# Altium PCB VRAM SIMM MT42C8255DJ v1.0_PCB_Altium.pcbdoc
Units mil, origin at the board's own origin, x right, y up, seen from the top; angles counter-clockwise.
Board outline 5060 x 1930 mil, 2 copper layers (Top Layer, Bottom Layer); 5 components, 59 nets, 290 pads, 64 vias.
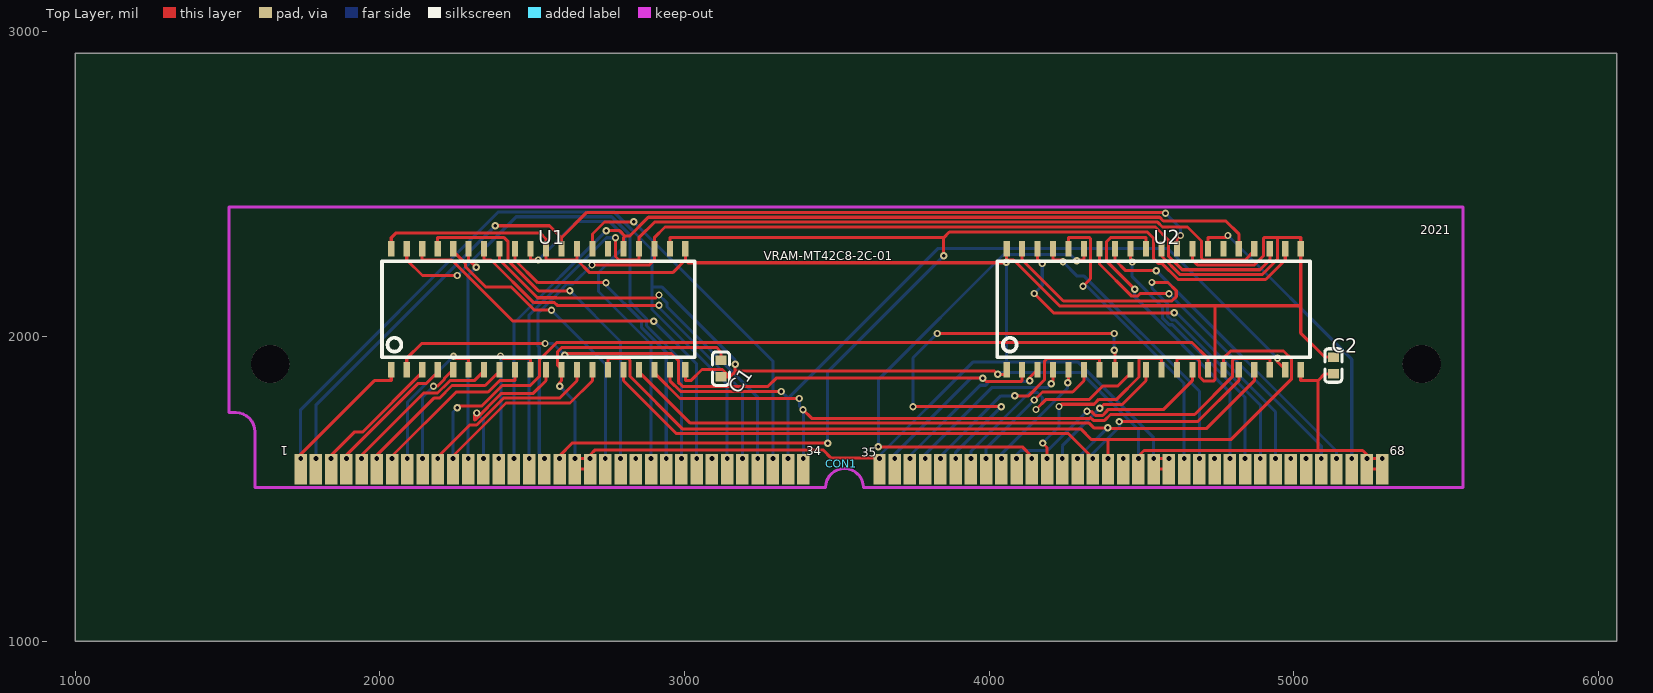
[diagram p0: Top Layer view]
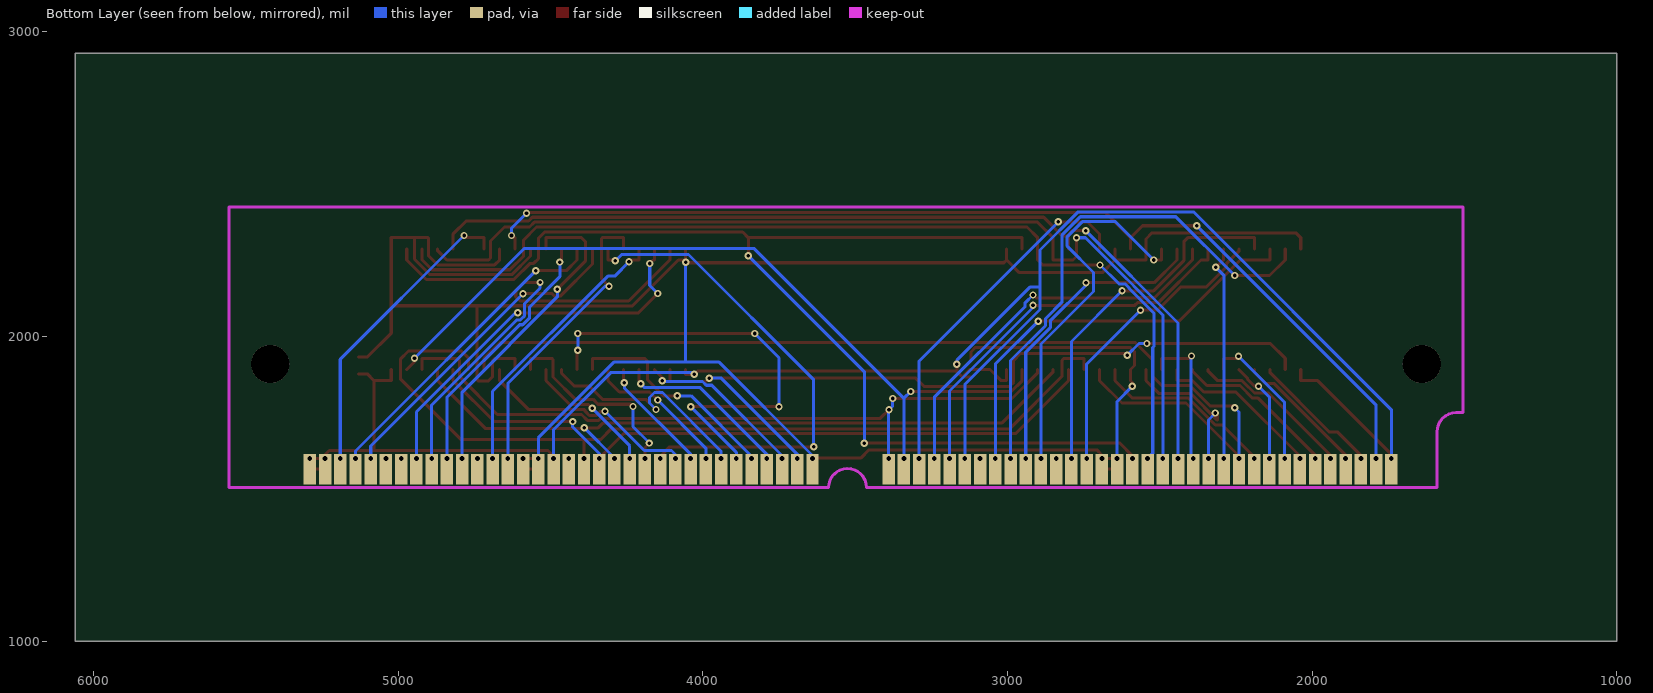
[diagram p1: Bottom Layer view, seen from below]

## Layer stack, top to bottom
Top Layer: signal copper (thickness not stored)
Dielectric: dielectric 12.6, FR-4, Dk 4.8
Bottom Layer: signal copper (thickness not stored)

## Board outline
6060,1000 1000,1000 1000,2930 6060,2930

## Components (designator, comment, footprint, x,y, rotation, side; value= is the part's Value field where it differs from the comment)
C1 "1uF" C0603 3120,1895 r90 top
C2 "1uF" C0603 5130,1905 r90 top
CON1 "SIMM68" SIMM68R 1720,1515 r0 top
U1 "MT42C8255DJ" SOJ40 2520,2095 r0 top
U2 "MT42C8255DJ" SOJ40 4540,2095 r0 top

## Footprints (in the part's own frame and the unit in brackets; to place one, negate y for a bottom-side part, rotate by r counter-clockwise, add the part's x,y. Pads: shape width x height; smd on the part's side, far side on the other; paste and mask are expansions set on the pad)
C0603 [mm]
  rect 0.8x0.9 smd: 1(-0.7,0) 2(0.7,0)
  silkscreen extent -1.4,-0.7 1.4,0.72
SIMM68R [mm]
  rect 1.04x2.54 smd: 1(0.508,1.27) 2(1.778,1.27) 3(3.048,1.27) 4(4.318,1.27) 5(5.588,1.27) 6(6.858,1.27) 7(8.128,1.27) 8(9.398,1.27) 9(10.668,1.27) 10(11.938,1.27) 11(13.208,1.27) 12(14.478,1.27) 13(15.748,1.27) 14(17.018,1.27) 15(18.288,1.27) 16(19.558,1.27) 17(20.828,1.27) 18(22.098,1.27) 19(23.368,1.27) 20(24.638,1.27) 21(25.908,1.27) 22(27.178,1.27) 23(28.448,1.27) 24(29.718,1.27) 25(30.988,1.27) 26(32.258,1.27) 27(33.528,1.27) 28(34.798,1.27) 29(36.068,1.27) 30(37.338,1.27) 31(38.608,1.27) 32(39.878,1.27) 33(41.148,1.27) 34(42.418,1.27) 35(48.768,1.27) 36(50.038,1.27) 37(51.308,1.27) 38(52.578,1.27) 39(53.848,1.27) 40(55.118,1.27) 41(56.388,1.27) 42(57.658,1.27) 43(58.928,1.27) 44(60.198,1.27) 45(61.468,1.27) 46(62.738,1.27) 47(64.008,1.27) 48(65.278,1.27) 49(66.548,1.27) 50(67.818,1.27) 51(69.088,1.27) 52(70.358,1.27) 53(71.628,1.27) 54(72.898,1.27) 55(74.168,1.27) 56(75.438,1.27) 57(76.708,1.27) 58(77.978,1.27) 59(79.248,1.27) 60(80.518,1.27) 61(81.788,1.27) 62(83.058,1.27) 63(84.328,1.27) 64(85.598,1.27) 65(86.868,1.27) 66(88.138,1.27) 67(89.408,1.27) 68(90.678,1.27)
  rect 1.04x2.54 smd far side: 1(0.508,1.27) 2(1.778,1.27) 3(3.048,1.27) 4(4.318,1.27) 5(5.588,1.27) 6(6.858,1.27) 7(8.128,1.27) 8(9.398,1.27) 9(10.668,1.27) 10(11.938,1.27) 11(13.208,1.27) 12(14.478,1.27) 13(15.748,1.27) 14(17.018,1.27) 15(18.288,1.27) 16(19.558,1.27) 17(20.828,1.27) 18(22.098,1.27) 19(23.368,1.27) 20(24.638,1.27) 21(25.908,1.27) 22(27.178,1.27) 23(28.448,1.27) 24(29.718,1.27) 25(30.988,1.27) 26(32.258,1.27) 27(33.528,1.27) 28(34.798,1.27) 29(36.068,1.27) 30(37.338,1.27) 31(38.608,1.27) 32(39.878,1.27) 33(41.148,1.27) 34(42.418,1.27) 35(48.768,1.27) 36(50.038,1.27) 37(51.308,1.27) 38(52.578,1.27) 39(53.848,1.27) 40(55.118,1.27) 41(56.388,1.27) 42(57.658,1.27) 43(58.928,1.27) 44(60.198,1.27) 45(61.468,1.27) 46(62.738,1.27) 47(64.008,1.27) 48(65.278,1.27) 49(66.548,1.27) 50(67.818,1.27) 51(69.088,1.27) 52(70.358,1.27) 53(71.628,1.27) 54(72.898,1.27) 55(74.168,1.27) 56(75.438,1.27) 57(76.708,1.27) 58(77.978,1.27) 59(79.248,1.27) 60(80.518,1.27) 61(81.788,1.27) 62(83.058,1.27) 63(84.328,1.27) 64(85.598,1.27) 65(86.868,1.27) 66(88.138,1.27) 67(89.408,1.27) 68(90.678,1.27)
  round 0.5 hole 0.4: 1(0.508,2.159) 2(1.778,2.159) 3(3.048,2.159) 4(4.318,2.159) 5(5.588,2.159) 6(6.858,2.159) 7(8.128,2.159) 8(9.398,2.159) 9(10.668,2.159) 10(11.938,2.159) 11(13.208,2.159) 12(14.478,2.159) 13(15.748,2.159) 14(17.018,2.159) 15(18.288,2.159) 16(19.558,2.159) 17(20.828,2.159) 18(22.098,2.159) 19(23.368,2.159) 20(24.638,2.159) 21(25.908,2.159) 22(27.178,2.159) 23(28.448,2.159) 24(29.718,2.159) 25(30.988,2.159) 26(32.258,2.159) 27(33.528,2.159) 28(34.798,2.159) 29(36.068,2.159) 30(37.338,2.159) 31(38.608,2.159) 32(39.878,2.159) 33(41.148,2.159) 34(42.418,2.159) 35(48.768,2.159) 36(50.038,2.159) 37(51.308,2.159) 38(52.578,2.159) 39(53.848,2.159) 40(55.118,2.159) 41(56.388,2.159) 42(57.658,2.159) 43(58.928,2.159) 44(60.198,2.159) 45(61.468,2.159) 46(62.738,2.159) 47(64.008,2.159) 48(65.278,2.159) 49(66.548,2.159) 50(67.818,2.159) 51(69.088,2.159) 52(70.358,2.159) 53(71.628,2.159) 54(72.898,2.159) 55(74.168,2.159) 56(75.438,2.159) 57(76.708,2.159) 58(77.978,2.159) 59(79.248,2.159) 60(80.518,2.159) 61(81.788,2.159) 62(83.058,2.159) 63(84.328,2.159) 64(85.598,2.159) 65(86.868,2.159) 66(88.138,2.159) 67(89.408,2.159) 68(90.678,2.159)
SOJ40 [mil]
  rect 20.3x50.8 smd: 1(-482.6,-203.2) 2(-431.8,-203.2) 3(-381,-203.2) 4(-330.2,-203.2) 5(-279.4,-203.2) 6(-228.6,-203.2) 7(-177.8,-203.2) 8(-127,-203.2) 9(-76.2,-203.2) 10(-25.4,-203.2) 11(25.4,-203.2) 12(76.2,-203.2) 13(127,-203.2) 14(177.8,-203.2) 15(228.6,-203.2) 16(279.4,-203.2) 17(330.2,-203.2) 18(381,-203.2) 19(431.8,-203.2) 20(482.6,-203.2) 21(482.6,193) 22(431.8,193) 23(381,193) 24(330.2,193) 25(279.4,193) 26(228.6,193) 27(177.8,193) 28(127,193) 29(76.2,193) 30(25.4,193) 31(-25.4,193) 32(-76.2,193) 33(-127,193) 34(-177.8,193) 35(-228.6,193) 36(-279.4,193) 37(-330.2,193) 38(-381,193) 39(-431.8,193) 40(-482.6,193)
  silkscreen extent -513,-163 513,152

## Free pads (board coordinates)
  round 125.2 hole 125.2 unplated: ""(1640,1910) ""(5420,1910)

## Via types
v1: diameter 24, hole 12, Top Layer to Bottom Layer, 64 vias

## Nets (pads, with @x,y where several pads share a name; then routed paths per layer and width w, separated by ;. In a path a pad name is that pad's centre, name@x,y a point inside that pad or via, vN(x,y) a via of type N, cw(c..) or ccw(c..) an arc to the next point about the centre after c; other vN are vias at no path point)
/CAS_A: CON1.32 U1.27 | length 1236.1
  Top Layer w10: U1.27 2697.8,2324.5 2697.8,2336.8 2737.3,2376.3 v1(2833.3,2376.3) ; CON1.32@3290,1565 CON1.32@3290,1600
  Bottom Layer w10: v1(2833.3,2376.3) 3290,1919.6 3290,1600 CON1.32@3290,1565
/CAS_B: CON1.66 U2.27 | length 1075.2
  Top Layer w10: U2.27 4717.8,2324.5 4776.5,2324.5 v1(4783.6,2331.6) ; CON1.66@5190,1565 CON1.66@5190,1600
  Bottom Layer w10: v1(4783.6,2331.6) 5190,1925.2 5190,1600 CON1.66@5190,1565
/DT/OE_1: CON1.5 U1.7 | length 601.8
  Top Layer w10: CON1.5@1940,1565 1940,1600 1940,1610.8 2143.2,1814 2185.7,1814 2186.2,1814.5 2189.3,1814.5 2223.4,1848.6 2230.1,1855.3 2309.8,1855.3 2342.2,1887.7 U1.7
  Bottom Layer w10: CON1.5@1940,1565 CON1.5@1940,1600
/DT/OE_2: CON1.23 | length 70
  Top Layer w10: CON1.23@2840,1565 CON1.23@2840,1600
  Bottom Layer w10: CON1.23@2840,1565 CON1.23@2840,1600
/DT/OE_3: CON1.39 U2.7 | length 804.9
  Top Layer w10: CON1.39@3840,1565 CON1.39@3840,1600 ; v1(4084.3,1805.6) 4129.5,1805.6 4181.2,1857.3 4181.2,1918.4 4191.1,1928.3 4362.2,1928.3 U2.7
  Bottom Layer w10: CON1.39@3840,1565 3840,1600 3840,1607.5 4038.1,1805.6 v1(4084.3,1805.6)
/DT/OE_4: CON1.57 | length 70
  Top Layer w10: CON1.57@4740,1565 CON1.57@4740,1600
  Bottom Layer w10: CON1.57@4740,1565 CON1.57@4740,1600
/RAS: CON1.11 U1.14 U2.14 | length 3489.4
  Top Layer w10: CON1.11@2240,1565 2240,1600 2240,1607.7 2413.9,1781.6 2624.1,1781.6 2697.8,1855.3 2697.8,1873.5 U1.14 ; v1(2254,1766.7) 2259.4,1772 2334.6,1772 2401.8,1839.2 2493.7,1839.2 2524.2,1869.6 2524.2,1924.2 2580.5,1980.5 4665.6,1980.5 4717.8,1928.3 U2.14
  Bottom Layer w10: CON1.11@2240,1565 2240,1600 2240,1752.6 v1(2254,1766.7)
/SE_A: CON1.12 U1.35 | length 779.4
  Top Layer w10: CON1.12@2290,1565 CON1.12@2290,1600 ; U1.35 2291.4,2251.5 2292,2251.5 v1(2316.1,2227.4)
  Bottom Layer w10: CON1.12@2290,1565 2290,1600 2290,2201.3 v1(2316.1,2227.4)
/SE_B: CON1.45 U2.35 | length 1705.9
  Top Layer w10: v1(3636.1,1638) 4108.5,1638 4140,1606.5 4140,1600 CON1.45@4140,1565 ; v1(4287.2,2248.3) 4290.4,2251.5 4311.4,2251.5 U2.35
  Bottom Layer w10: v1(3636.1,1638) 3636.1,1858.6 4046.7,2269.2 4266.4,2269.2 v1(4287.2,2248.3) ; CON1.45@4140,1565 CON1.45@4140,1600
/WB/WE_1: CON1.10 U1.13 | length 671.9
  Top Layer w10: CON1.10@2190,1565 2190,1600 2190,1604.6 2294.8,1709.5 2317.6,1709.5 2405.9,1797.7 2589.4,1797.7 2647,1855.3 U1.13
  Bottom Layer w10: CON1.10@2190,1565 CON1.10@2190,1600
/WB/WE_2: CON1.28 | length 70
  Top Layer w10: CON1.28@3090,1565 CON1.28@3090,1600
  Bottom Layer w10: CON1.28@3090,1565 CON1.28@3090,1600
/WB/WE_3: CON1.44 U2.13 | length 809.6
  Top Layer w10: CON1.44@4090,1565 CON1.44@4090,1600 ; v1(4320.8,1754.7) 4334.7,1754.7 4348.4,1741.1 4372.5,1741.1 4386,1754.6 4386,1757.1 4388.9,1760.1 4571.8,1760.1 4667,1855.3 U2.13
  Bottom Layer w10: CON1.44@4090,1565 4090,1600 4090,1613.1 4103,1626.1 4192.1,1626.1 v1(4320.8,1754.7)
/WB/WE_4: CON1.62 | length 70
  Top Layer w10: CON1.62@4990,1565 CON1.62@4990,1600
  Bottom Layer w10: CON1.62@4990,1565 CON1.62@4990,1600
A0: CON1.15 U1.25 U2.25 | length 3167.8
  Top Layer w10: CON1.15@2440,1565 CON1.15@2440,1600 ; v1(2743,2347.4) 2786.9,2347.4 2804.6,2329.7 ; U1.25 2799.4,2324.5 2804.6,2329.7 ; U2.25 4819.4,2324.5 4819.4,2337 4776.9,2379.5 4571.7,2379.5 4559.7,2391.6 2881.3,2391.6 2819.4,2329.7 2804.6,2329.7
  Bottom Layer w10: CON1.15@2440,1565 2440,1600 2440,2044.4 v1(2743,2347.4)
A1: CON1.16 U1.24 U2.24 | length 3289.8
  Top Layer w10: CON1.16@2490,1565 CON1.16@2490,1600 ; v1(2773.5,2324.3) 2773.5,2262.7 2784.7,2251.5 2850.2,2251.5 U1.24 2850.2,2324.5 2901.2,2375.5 4553,2375.5 4568.7,2359.7 4650.7,2359.7 4696.6,2313.8 4696.6,2258 4703.1,2251.5 4840.1,2251.5 4870.2,2281.6 U2.24
  Bottom Layer w10: CON1.16@2490,1565 2490,1600 2490,2070.5 2584.6,2165.1 2584.6,2166.1 2607.5,2189.1 2608.6,2189.1 2743.7,2324.3 v1(2773.5,2324.3)
A2: CON1.17 U1.23 U2.23 | length 3256.2
  Top Layer w10: CON1.17@2540,1565 CON1.17@2540,1600 ; v1(2696.2,2235) 2884.5,2235 2901,2251.5 U1.23 2901,2306.2 2901,2324.5 2935.9,2359.4 4545.9,2359.4 4588.2,2317 4588.2,2264.7 4633.7,2219.3 4888.8,2219.3 4921,2251.5 U2.23
  Bottom Layer w10: CON1.17@2540,1565 2540,1600 2523.1,1616.9 2523.1,1963.9 2519.2,1967.8 2519.2,2076.5 2600.7,2158 2600.7,2159.5 2614.2,2173 2634.2,2173 v1(2696.2,2235)
A3: CON1.18 U1.22 U2.22 | length 4039.6
  Top Layer w10: CON1.18@2590,1565 2590,1600 2590,1609.1 2630.9,1650 v1(3470,1650) ; U1.22 2951.8,2306.2 2951.8,2324.5 3850.6,2324.5 ; v1(3850.6,2265.4) 3850.6,2324.5 ; U2.22 4971.8,2251.5 4907.3,2187 4620.3,2187 4566.9,2240.5 4555,2240.5 4539.6,2255.8 4539.6,2322.8 4519.2,2343.2 3869.3,2343.2 3850.6,2324.5
  Bottom Layer w10: CON1.18@2590,1565 CON1.18@2590,1600 ; v1(3470,1650) 3470,1884.8 v1(3850.6,2265.4)
A4: CON1.33 U1.19 U2.19 | length 2722.4
  Top Layer w10: U1.19 2951.8,1855.3 2987.3,1819.8 v1(3317.9,1819.8) ; CON1.33@3340,1565 CON1.33@3340,1600 ; v1(4946.3,1928.9) 4946.3,1917.3 U2.19
  Bottom Layer w10: v1(3317.9,1819.8) 3340,1797.7 ; CON1.33@3340,1565 3340,1600 3340,1797.7 ; v1(4946.3,1928.9) 4586.7,2288.5 3830.9,2288.5 3340,1797.7
A5: CON1.34 U1.18 U2.18 | length 2495.2
  Top Layer w10: U1.18 2901,1880.8 2985.1,1796.7 v1(3376.9,1796.7) ; v1(3388.7,1760.1) 3417.1,1731.7 4330.4,1731.7 4332.7,1734 4341.7,1725 4379.1,1725 4398.1,1744 4674.5,1744 4798.2,1867.6 4798.2,1922 4804.4,1928.3 4921,1928.3 U2.18 ; CON1.34@3390,1565 CON1.34@3390,1600
  Bottom Layer w10: v1(3376.9,1796.7) 3376.9,1771.8 v1(3388.7,1760.1) 3390,1758.7 3390,1600 CON1.34@3390,1565
A6: CON1.48 U1.17 U2.17 | length 2417.8
  Top Layer w10: U1.17 2850.2,1884.5 3019.2,1715.5 4328.3,1715.5 4343.4,1700.5 v1(4388.9,1700.5) 4391.6,1697.8 4712.7,1697.8 4870.2,1855.3 U2.17 ; CON1.48@4290,1565 CON1.48@4290,1600
  Bottom Layer w10: CON1.48@4290,1565 4290,1600 4290,1601.6 v1(4388.9,1700.5)
A7: CON1.49 U1.16 U2.16 | length 2395.1
  Top Layer w10: U1.16 2799.4,1855.3 2973.6,1681.1 4260.2,1681.1 4340,1601.3 4340,1600 CON1.49@4340,1565 ; v1(4427.1,1720.9) 4685,1720.9 4819.4,1855.3 U2.16
  Bottom Layer w10: CON1.49@4340,1565 4340,1600 4340,1615.9 4427.1,1703 v1(4427.1,1720.9)
A8: CON1.50 U1.15 U2.15 | length 2982.7
  Top Layer w10: U1.15 2748.6,1928.3 2814.2,1928.3 2820.7,1921.8 2820.7,1869.5 2993,1697.2 4300.1,1697.2 4334.5,1662.8 4390,1662.8 ; CON1.50@4390,1565 4390,1600 4390,1662.8 ; U2.15 4768.6,1928.3 4792.8,1952.4 4966,1952.4 4993,1925.4 4993,1861.3 4794.6,1662.8 4390,1662.8
  Bottom Layer w10: CON1.50@4390,1565 CON1.50@4390,1600
DSF: CON1.2 U1.29 U2.29 | length 3510.9
  Top Layer w10: CON1.2@1790,1565 CON1.2@1790,1600 ; v1(2379,2363.7) 2557,2363.7 2596.2,2324.5 ; U1.29 2596.2,2324.5 ; v1(4578.9,2405) 4576.2,2407.7 2679.4,2407.7 2596.2,2324.5 ; U2.29 4616.2,2324.5 4621,2324.5 v1(4628,2331.6)
  Bottom Layer w10: CON1.2@1790,1565 1790,1600 1790,1774.7 v1(2379,2363.7) ; v1(4578.9,2405) 4628,2355.9 v1(4628,2331.6)
GND: C1.2 C2.2 CON1.19 CON1.20 CON1.35 CON1.53 CON1.54 U1.12 U1.21 U1.28 U1.30 U1.40 U2.12 U2.21 U2.28 U2.30 U2.40 | length 9182.8
  Top Layer w10: U1.40 2037.4,2324.5 2053.5,2340.6 2525.3,2340.6 2545.4,2320.5 U1.30 2545.4,2251.5 2647,2251.5 ; v1(2590.2,1836.9) 2590.2,1849.3 2596.2,1855.3 2596.2,1873.5 U1.12 2583.3,1904.7 2583.3,1950.2 2597.5,1964.4 3105,1964.4 3120,1949.4 C1.2 ; CON1.19@2640,1565 2690,1565 2690,1600 CON1.19@2640,1600 ; U1.28 2647,2251.5 ; CON1.20@2689.8,1600.7 2689.8,1611.2 2706.9,1628.3 3454.2,1628.3 3481.7,1600.7 CON1.35@3639.8,1600.7 ; U1.21 3002.6,2255.5 3002.6,2251.5 ; CON1.35@3640,1565 CON1.35@3640,1600 ; U2.40 v1@4057.4,2251.5 ; CON1.53@4540,1565 4590,1565 4590,1600 CON1.53@4540,1600 ; U2.30 4565.4,2264.7 4627,2203.1 4895.5,2203.1 4946.4,2254.1 4946.4,2324.5 ; U2.12 4616.2,1928.3 4682.3,1928.3 4690.3,1920.3 4690.3,1868.1 4704.8,1853.5 4735.5,1853.5 4740.6,1858.6 4740.6,2101.1 ; U2.28 4667,2251.5 4683.1,2235.4 4870.9,2235.4 4899.8,2264.3 4899.8,2321.6 4902.7,2324.5 4946.4,2324.5 ; C2.2 5101.2,1932.6 5022.6,2011.1 5022.6,2101.1 ; 2647,2251.5 2688.7,2209.8 2960.9,2209.8 3002.6,2251.5 ; 3002.6,2251.5 3011.8,2242.3 4054.5,2242.3 v1(4056.1,2243.9) 4056.1,2250.2 v1@4057.4,2251.5 ; v1@4057.4,2251.5 4080.2,2251.5 4231.3,2100.4 4500.3,2100.4 4501,2101.1 4740.6,2101.1 ; 4740.6,2101.1 5022.6,2101.1 ; 4946.4,2324.5 5022.6,2324.5 U2.21 5022.6,2269.7 5022.6,2251.5 5022.6,2101.1
  Bottom Layer w10: v1(2590.2,1836.9) 2640,1787.1 2640,1600 CON1.19@2640,1565 ; CON1.20@2690,1565 CON1.20@2690,1600 ; CON1.35@3640,1565 3640,1600 3640,1609.3 3947.8,1917.1 4056.1,1917.1 ; v1(4056.1,2243.9) 4056.1,1917.1 ; CON1.53@4540,1565 4540,1600 4540,1667.6 4290.5,1917.1 4056.1,1917.1 ; CON1.54@4590,1565 CON1.54@4590,1600
I/O1_A: CON1.6 U1.8 | length 603.2
  Top Layer w10: CON1.6@1990,1565 1990,1600 1990,1610.8 2177.1,1797.9 2195.5,1797.9 2236.8,1839.2 2345.6,1839.2 2393,1886.6 U1.8
  Bottom Layer w10: CON1.6@1990,1565 CON1.6@1990,1600
I/O1_B: CON1.40 U2.8 | length 1599.7
  Top Layer w10: v1(3750,1770) v1(4040,1770) ; v1(3830,2010) v1(4410,2010) ; CON1.40@3890,1565 CON1.40@3890,1600 ; v1(4410,1955) 4413,1952 U2.8
  Bottom Layer w10: v1(3750,1770) 3750,1930 v1(3830,2010) ; CON1.40@3890,1600 3890,1565 3890,1620 v1(4040,1770) ; v1(4410,1955) v1(4410,2010)
I/O2_A: CON1.7 U1.9 | length 620.6
  Top Layer w10: CON1.7@2040,1565 2040,1600 2040,1607.8 2250.4,1818.1 2355.6,1818.1 2392.8,1855.3 2443.8,1855.3 U1.9
  Bottom Layer w10: CON1.7@2040,1565 CON1.7@2040,1600
I/O2_B: CON1.41 U2.9 | length 835
  Top Layer w10: CON1.41@3940,1565 CON1.41@3940,1600 ; v1(4153.7,1760.5) 4187.1,1794 4329.2,1794 4373.2,1838 4422.1,1838 4463.8,1879.7 U2.9
  Bottom Layer w10: CON1.41@3940,1565 3940,1600 3940,1623.8 4132.4,1816.2 4158.7,1816.2 4174.9,1800 4174.9,1781.7 v1(4153.7,1760.5)
I/O3_A: CON1.14 U1.10 | length 547.8
  Top Layer w10: CON1.14@2390,1565 CON1.14@2390,1600 ; v1(2395.7,1935.9) 2403.3,1928.3 2494.6,1928.3 U1.10
  Bottom Layer w10: CON1.14@2390,1565 2390,1600 2396.9,1606.9 2396.9,1934.6 v1(2395.7,1935.9)
I/O3_B: CON1.47 U2.10 | length 511
  Top Layer w10: CON1.47@4240,1565 CON1.47@4240,1600 ; v1(4362.9,1764.2) 4375.9,1777.1 4436.4,1777.1 4514.6,1855.3 U2.10
  Bottom Layer w10: CON1.47@4240,1565 4240,1600 4240,1641.3 v1(4362.9,1764.2)
I/O4_A: CON1.13 U1.11 | length 579
  Top Layer w10: v1(2317.5,1748.9) 2310.9,1742.3 2310.9,1725.6 2311,1725.6 2399.2,1813.8 2503.9,1813.8 2545.4,1855.3 U1.11 ; CON1.13@2340,1565 CON1.13@2340,1600
  Bottom Layer w10: v1(2317.5,1748.9) 2340,1726.4 2340,1600 CON1.13@2340,1565
I/O4_B: CON1.46 U2.11 | length 740.5
  Top Layer w10: v1(4175.3,1650.3) 4190,1635.7 4190,1600 CON1.46@4190,1565 ; v1(4229.1,1770.2) 4236.8,1777.8 4343.9,1777.8 4360,1794 4418.8,1794 4491.8,1866.9 4491.8,1924.3 4495.8,1928.3 4565.4,1928.3 U2.11
  Bottom Layer w10: v1(4175.3,1650.3) 4229.1,1704.1 v1(4229.1,1770.2) ; CON1.46@4190,1565 CON1.46@4190,1600
I/O5_A: CON1.24 U1.31 | length 1323.3
  Top Layer w10: U1.31 2494.6,2251.5 v1(2519.9,2251.5) ; CON1.24@2890,1565 CON1.24@2890,1600
  Bottom Layer w10: v1(2519.9,2251.5) 2645.4,2377.1 2754.3,2377.1 2804.2,2327.2 2804.2,2296.7 2717.7,2210.3 2717.7,2147.9 2890,1975.7 2890,1600 CON1.24@2890,1565
I/O5_B: CON1.58 U2.31 | length 1120.2
  Top Layer w10: v1(4477.3,2155.7) 4385.5,2247.5 4385.5,2311.7 4398.3,2324.5 4514.6,2324.5 U2.31 ; CON1.58@4790,1565 CON1.58@4790,1600
  Bottom Layer w10: v1(4477.3,2155.7) 4477.3,2130.2 4790,1817.5 4790,1600 CON1.58@4790,1565
I/O6_A: CON1.25 U1.32 | length 1094.7
  Top Layer w10: U1.32 2443.8,2251.5 2518.5,2176.9 v1(2742.4,2176.9) ; CON1.25@2940,1565 CON1.25@2940,1600
  Bottom Layer w10: v1(2742.4,2176.9) 2742.4,2168.8 2859.3,2051.9 2859.3,2029.1 2940,1948.5 2940,1600 CON1.25@2940,1565
I/O6_B: CON1.59 U2.32 | length 919.5
  Top Layer w10: U2.32 4463.8,2251.5 4469.3,2246 v1(4469.3,2244.4) ; CON1.59@4840,1565 CON1.59@4840,1600
  Bottom Layer w10: v1(4469.3,2244.4) 4469.3,2196.4 4568.5,2097.1 4568.5,2061.7 4591.5,2038.8 4601.2,2038.8 4840,1799.9 4840,1600 CON1.59@4840,1565
I/O7_A: CON1.31 U1.33 | length 1356.2
  Top Layer w10: U1.33 2393,2251.5 2517.2,2127.3 2579.7,2127.3 2580.2,2126.8 2906.5,2126.8 v1(2916.2,2136.6) ; CON1.31@3240,1565 CON1.31@3240,1600
  Bottom Layer w10: v1(2916.2,2136.6) 2941.9,2110.9 2941.9,2098.9 3240,1800.9 3240,1600 CON1.31@3240,1565
I/O7_B: CON1.65 U2.33 | length 1117.7
  Top Layer w10: U2.33 4413,2251.5 4448.2,2216.4 v1(4548.2,2216.4) ; CON1.65@5140,1565 CON1.65@5140,1600
  Bottom Layer w10: v1(4548.2,2216.4) 5140,1624.5 5140,1600 CON1.65@5140,1565
I/O8_A: CON1.30 U1.34 | length 1358.2
  Top Layer w10: U1.34 2342.2,2251.5 2365,2251.5 2505.3,2111.2 2573,2111.2 2581.8,2102.5 v1(2916.3,2102.5) ; CON1.30@3190,1565 CON1.30@3190,1600
  Bottom Layer w10: v1(2916.3,2102.5) 2916.3,2095.2 3190,1821.5 3190,1600 CON1.30@3190,1565
I/O8_B: CON1.64 U2.34 | length 1142.8
  Top Layer w10: U2.34 4362.2,2251.5 4362.2,2238.2 4467.8,2132.6 4486.9,2132.6 4495.2,2140.9 v1(4590,2140.9) ; CON1.64@5090,1565 CON1.64@5090,1600
  Bottom Layer w10: v1(4590,2140.9) 5090,1640.9 5090,1600 CON1.64@5090,1565
S$68: 
SC: CON1.36 U1.2 U2.2 | length 2746.8
  Top Layer w10: U1.2 2088.2,1928.3 2137.3,1977.4 v1(2542.3,1977.4) ; v1(2606.8,1938.9) 2612.5,1944.6 2956.9,1944.6 2979.8,1921.8 2979.8,1850.1 2994,1835.9 3273.3,1835.9 3300.6,1863.2 v1(3979.1,1863.2) 3989.6,1852.6 4105.5,1852.6 4108.2,1855.3 U2.2 ; CON1.36@3690,1565 3690,1600 CON1.36@3690,1565
  Bottom Layer w10: v1(2542.3,1977.4) 2568.4,1977.4 v1(2606.8,1938.9) ; CON1.36@3690,1565 3690,1600 3690,1613.9 3939.3,1863.2 v1(3979.1,1863.2)
SI/O1_A: CON1.3 U1.3 | length 501.6
  Top Layer w10: CON1.3@1840,1565 1840,1600 1840,1610.8 1915.5,1686.3 1942.8,1686.3 2139,1882.6 U1.3
  Bottom Layer w10: CON1.3@1840,1565 CON1.3@1840,1600
SI/O1_B: CON1.37 U2.3 | length 621.7
  Top Layer w10: CON1.37@3740,1565 CON1.37@3740,1600 ; v1(4133,1855.4) 4133,1865.8 U2.3
  Bottom Layer w10: CON1.37@3740,1565 3740,1600 3740,1609.8 3970.3,1840.1 3988.6,1840.1 4001.3,1852.7 4130.3,1852.7 v1(4133,1855.4)
SI/O2_A: CON1.4 U1.4 | length 501.9
  Top Layer w10: CON1.4@1890,1565 1890,1600 1890,1610.8 2125.8,1846.6 2152.9,1846.6 2189.8,1883.4 U1.4
  Bottom Layer w10: CON1.4@1890,1565 CON1.4@1890,1600
SI/O2_B: CON1.38 U2.4 | length 642.7
  Top Layer w10: CON1.38@3790,1565 CON1.38@3790,1600 ; v1(4203.5,1844.9) 4203.5,1849 4209.8,1855.3 U2.4
  Bottom Layer w10: CON1.38@3790,1565 3790,1600 3790,1614 4008.3,1832.3 4190.9,1832.3 v1(4203.5,1844.9)
SI/O3_A: CON1.9 U1.5 | length 411.1
  Top Layer w10: CON1.9@2140,1565 CON1.9@2140,1600 ; v1(2176.1,1837.1) 2189.1,1837.1 2212,1860 2212,1863.2 U1.5
  Bottom Layer w10: CON1.9@2140,1565 2140,1600 2140,1801 v1(2176.1,1837.1)
SI/O3_B: CON1.43 U2.5 | length 453.2
  Top Layer w10: CON1.43@4040,1565 CON1.43@4040,1600 ; v1(4257.5,1848) 4257.5,1852.2 4260.6,1855.3 U2.5
  Bottom Layer w10: CON1.43@4040,1565 4040,1600 4040,1613.7 4257.5,1831.2 v1(4257.5,1848)
SI/O4_A: CON1.8 U1.6 | length 557.4
  Top Layer w10: CON1.8@2090,1565 CON1.8@2090,1600 ; v1(2241.8,1935.5) 2249,1928.3 2291.4,1928.3 U1.6
  Bottom Layer w10: CON1.8@2090,1565 2090,1600 2090,1783.6 v1(2241.8,1935.5)
SI/O4_B: CON1.42 U2.6 | length 553.2
  Top Layer w10: CON1.42@3990,1565 CON1.42@3990,1600 ; v1(4148.4,1791.8) 4174.7,1818.1 4274.2,1818.1 4311.4,1855.3 U2.6
  Bottom Layer w10: CON1.42@3990,1565 3990,1600 3990,1633.4 v1(4148.4,1791.8)
SI/O5_A: CON1.21 U1.36 | length 1046.9
  Top Layer w10: U1.36 2240.6,2279.5 2281.7,2238.5 2281.7,2228.2 2346.5,2163.3 2430.4,2163.3 2507.3,2086.4 v1(2563.5,2086.4) ; CON1.21@2740,1565 CON1.21@2740,1600
  Bottom Layer w10: v1(2563.5,2086.4) 2740,1909.8 2740,1600 CON1.21@2740,1565
SI/O5_B: CON1.55 U2.36 | length 1056.9
  Top Layer w10: U2.36 4260.6,2324.5 4329.7,2324.5 4332.7,2321.6 4332.7,2189.9 v1(4307.9,2165.1) ; CON1.55@4640,1565 CON1.55@4640,1600
  Bottom Layer w10: v1(4307.9,2165.1) 4321,2165.1 4640,1846.1 4640,1600 CON1.55@4640,1565
SI/O6_A: CON1.22 U1.37 | length 1268.1
  Top Layer w10: U1.37 2189.8,2324.5 2407.8,2324.5 2421,2311.3 2421,2248.9 2520,2149.9 v1(2623.8,2149.9) ; CON1.22@2790,1565 CON1.22@2790,1600
  Bottom Layer w10: v1(2623.8,2149.9) 2790,1983.7 2790,1600 CON1.22@2790,1565
SI/O6_B: CON1.56 U2.37 | length 985.5
  Top Layer w10: U2.37 4209.8,2251.5 4235.8,2251.5 v1(4242.1,2245.2) ; CON1.56@4690,1565 CON1.56@4690,1600
  Bottom Layer w10: v1(4242.1,2245.2) 4288.9,2198.4 4311.7,2198.4 4690,1820.1 4690,1600 CON1.56@4690,1565
SI/O7_A: CON1.27 U1.38 | length 1458.7
  Top Layer w10: U1.38 2139,2251.5 2235.6,2251.5 2436.8,2050.3 v1(2899.3,2050.3) ; CON1.27@3040,1565 CON1.27@3040,1600
  Bottom Layer w10: v1(2899.3,2050.3) 3040,1909.6 3040,1600 CON1.27@3040,1565
SI/O7_B: CON1.61 U2.38 | length 1342
  Top Layer w10: v1(4147.7,2141.3) 4211.1,2078 v1(4607.7,2078) ; U2.38 4159,2251.5 4162.6,2251.5 v1(4174.1,2239.9) ; CON1.61@4940,1565 CON1.61@4940,1600
  Bottom Layer w10: v1(4147.7,2141.3) 4174.1,2167.7 v1(4174.1,2239.9) ; v1(4607.7,2078) 4614.8,2078 4940,1752.8 4940,1600 CON1.61@4940,1565
SI/O8_A: CON1.26 U1.39 | length 1768.4
  Top Layer w10: U1.39 2088.2,2251.5 2139.6,2200.2 v1(2254.3,2200.2) ; CON1.26@2990,1565 CON1.26@2990,1600
  Bottom Layer w10: v1(2254.3,2200.2) 2447.3,2393.2 2760.9,2393.2 2820.3,2333.8 2820.3,2113.8 2875.4,2058.6 2875.4,2035.8 2990,1921.2 2990,1600 CON1.26@2990,1565
SI/O8_B: CON1.60 U2.39 | length 1517
  Top Layer w10: U2.39 4108.2,2251.5 4243.2,2116.5 4493.6,2116.5 4494.3,2117.2 4600.2,2117.2 4614,2131 4614,2150.5 4586.8,2177.7 v1(4534.1,2177.7) ; CON1.60@4890,1565 CON1.60@4890,1600
  Bottom Layer w10: v1(4534.1,2177.7) 4534.1,2158.8 4584.7,2108.2 4584.7,2068.4 4598.2,2054.9 4610.2,2054.9 4890,1775.1 4890,1600 CON1.60@4890,1565
VCC: C1.1 C2.1 CON1.1 CON1.29 CON1.52 CON1.67 CON1.68 U1.1 U1.20 U2.1 U2.20 | length 6667
  Top Layer w10: CON1.1@1740,1565 1740,1600 1740,1613.6 1981.7,1855.3 2037.4,1855.3 2037.4,1877.6 U1.1 ; U1.20 3002.6,1855.3 3020.9,1855.3 3057.4,1891.8 3124.5,1891.8 3148.8,1867.4 ; C1.1 3148.8,1867.4 ; CON1.29@3140,1565 CON1.29@3140,1600 ; v1(3166,1908.9) 3166,1886.3 ; U2.1 4057.4,1875.8 v1(4028.1,1875.8) 4017.6,1886.3 3166,1886.3 ; CON1.52@4490,1565 4490,1600 4490,1607.7 4508.4,1626.1 5079.1,1626.1 ; U2.20 5022.6,1855.3 5079.1,1855.3 ; C2.1 5101.2,1877.4 5079.1,1855.3 ; CON1.67@5240,1565 5290,1565 5290,1600 5240,1600 5240,1612 5225.9,1626.1 5079.1,1626.1 ; 3148.8,1867.4 3166,1884.6 3166,1886.3 ; 5079.1,1626.1 5079.1,1855.3
  Bottom Layer w10: CON1.1@1740,1565 1740,1600 1740,1759.8 2389.5,2409.3 2767.6,2409.3 2893.1,2283.8 2893.1,2163.2 ; CON1.29@3140,1565 3140,1600 3140,1842.3 2893.1,2089.1 2893.1,2163.2 ; v1(3166,1908.9) 3166,1922.1 2924.9,2163.2 2893.1,2163.2 ; v1(4028.1,1875.8) 4033.7,1881.4 4302.6,1881.4 4490,1694 4490,1600 CON1.52@4490,1565 ; CON1.67@5240,1565 CON1.67@5240,1600 ; CON1.68@5290,1565 CON1.68@5290,1600
pads on no net: CON1.51 CON1.63 U1.26 U2.26

## Silkscreen, mask and mechanical layers (free items; w line width, h text height)
Top Overlay:
  text "2021" at 5415,2335.39 h29.21
  text "VRAM-MT42C8-2C-01" at 3260,2250.39 h29.21
  text "1" at 1700,1639.61 h29.21 r180
  text "34" at 3400,1610.39 h29.21
  text "68" at 5315,1610.39 h29.21
  text "35" at 3580,1605.39 h29.21
Document:
  lines w0.1: 3529,1964 3531,1966